# EAGLE board singlesided (EAGLE 8.1.1)

Size 54.28 x 38.09 mm. Coordinates in mm from the lower left corner, seen from the top.
Outline: 0,0 54.28,0 54.28,38.09 0,38.09 0,0
Copper layers (1*16): Top 0.035mm / dielectric 1.5mm / Bottom 0.035mm
Design rules "default": minimum track width 10mil, minimum drill 24mil, track to track 8mil, track to pad 8mil, pad to pad 8mil, via to via 8mil, smd to smd 8mil, copper to edge 40mil, drill to drill 8mil, minimum pad ring 10mil, minimum via ring 10mil, stop-mask expansion 0mil, vias tented up to drill 0mil, thermal gap 10mil
tRestrict: area -0.2,34.9 to 54.4,38.1; area 15.7,3.2 to 54.4,24.1; area 46.8,24.1 to 52.5,31.7

## Footprints (pad centres in the part's own frame; a part is rotated, then mirrored left to right if it is on the bottom)
E2,5-6 = drill 0.813 pad 1.6: + -1.27,0 | drill 0.813 pad 1.6 octagon: - 1.27,0
C025-025X050 = drill 0.813 octagon: 1 -1.27,0; 2 1.27,0
C2,5-2 = drill 0.813 pad 1.6 octagon: 1 -1.27,0; 2 1.27,0
DO35-10 = drill 0.813 pad 1.6 octagon: A 5.08,0 | drill 0.813 pad 1.6: K -5.08,0
DIL18 = drill 0.813 pad 1.6: 1 -10.16,-3.81 | drill 0.813 pad 1.6 octagon: 2 -7.62,-3.81; 3 -5.08,-3.81; 4 -2.54,-3.81; 5 0,-3.81; 6 2.54,-3.81; 7 5.08,-3.81; 8 7.62,-3.81; 9 10.16,-3.81; 10 10.16,3.81; 11 7.62,3.81; 12 5.08,3.81; 13 2.54,3.81; 14 0,3.81; 15 -2.54,3.81; 16 -5.08,3.81; 17 -7.62,3.81; 18 -10.16,3.81
1X20 = drill 1.016 pad 1.575 octagon: 1 -24.13,0; 2 -21.59,0; 3 -19.05,0; 4 -16.51,0; 5 -13.97,0; 6 -11.43,0; 7 -8.89,0; 8 -6.35,0; 9 -3.81,0; 10 -1.27,0; 11 1.27,0; 12 3.81,0; 13 6.35,0; 14 8.89,0; 15 11.43,0; 16 13.97,0; 17 16.51,0; 18 19.05,0; 19 21.59,0; 20 24.13,0
QS = drill 0.61 pad 1.6 octagon: 1 -2.54,0; 2 2.54,0
0207/10 = drill 0.813 octagon: 1 -5.08,0; 2 5.08,0
TO92 = drill 0.813 octagon: 1 -1.27,0; 2 0,1.905; 3 1.27,0

## Placement (x,y rotation side)
C1  10u  [E2,5-6]  50,10.79 0 top
C2  10u  [E2,5-6]  50,23.49 0 top
C3  10n  [C025-025X050]  50,5.71 180 top
C4  10n  [C025-025X050]  50,28.57 180 top
C5  27p  [C2,5-2]  43.65,13.33 270 top
C6  27p  [C2,5-2]  32.22,6.98 90 top
D1  1N4148  [DO35-10]  23.33,5.71 0 top
IC1  16F84  [DIL18]  28.41,18.41 180 top
J1  [1X20]  27.14,34.92 180 top
Q1  [QS]  39.84,6.98 0 top
R1  2.2k  [0207/10]  23.33,9.52 0 top
U1  78L05  [TO92]  50,17.14 270 top

## Library data of the parts
C1 C2 = polcap
C3 C4 R1 = rcl
C5 C6 = capacitor-wima
D1 = diode
IC1 = microchip
J1 = PINHEAD
Q1 = special
U1 = linear

## Nets
+12V: C1.+ C3.2 J1.2 U1.3
A0: IC1.17 J1.4
A1: IC1.18 J1.5
A2: IC1.1 J1.6
A3: IC1.2 J1.7
A4: IC1.3 J1.8
B0: IC1.6 J1.9
B1: IC1.7 J1.10
B2: IC1.8 J1.11
B3: IC1.9 J1.12
B4: IC1.10 J1.13
B5: IC1.11 J1.14
B6: IC1.12 J1.15 J1.18
B7: IC1.13 J1.16 J1.17
GND: C1.- C2.- C3.1 C4.1 C5.1 C6.1 IC1.5 J1.1 J1.20 U1.2
N$1: D1.K IC1.4 J1.19
N$2: D1.A R1.1
N$3: C5.2 IC1.16 Q1.2
N$4: C6.2 IC1.15 Q1.1
VCC: C2.+ C4.2 IC1.14 J1.3 R1.2 U1.1

## Tracks (layer width: path | path; a pad name or v marks a point on that pad's centre or on a via)
+12V  (3 unrouted)
A0  (1 unrouted)
A1  (1 unrouted)
A2  (1 unrouted)
A3  (1 unrouted)
A4  (1 unrouted)
B0  (1 unrouted)
B1  (1 unrouted)
B2  (1 unrouted)
B3  (1 unrouted)
B4  (1 unrouted)
B5  (1 unrouted)
B6  (2 unrouted)
B7  (2 unrouted)
GND  (9 unrouted)
N$1  (2 unrouted)
N$2  (1 unrouted)
N$3  (2 unrouted)
N$4  (2 unrouted)
VCC  (5 unrouted)